# Altium PCB Power_Supply.PcbDoc (part 2 of 2)
Units mm, origin at the board's own origin, x right, y up, seen from the top; angles counter-clockwise.
Board outline 100.2 x 49.53 mm, 2 copper layers (Top Layer, Bottom Layer); 41 components, 25 nets, 105 pads, 0 vias.
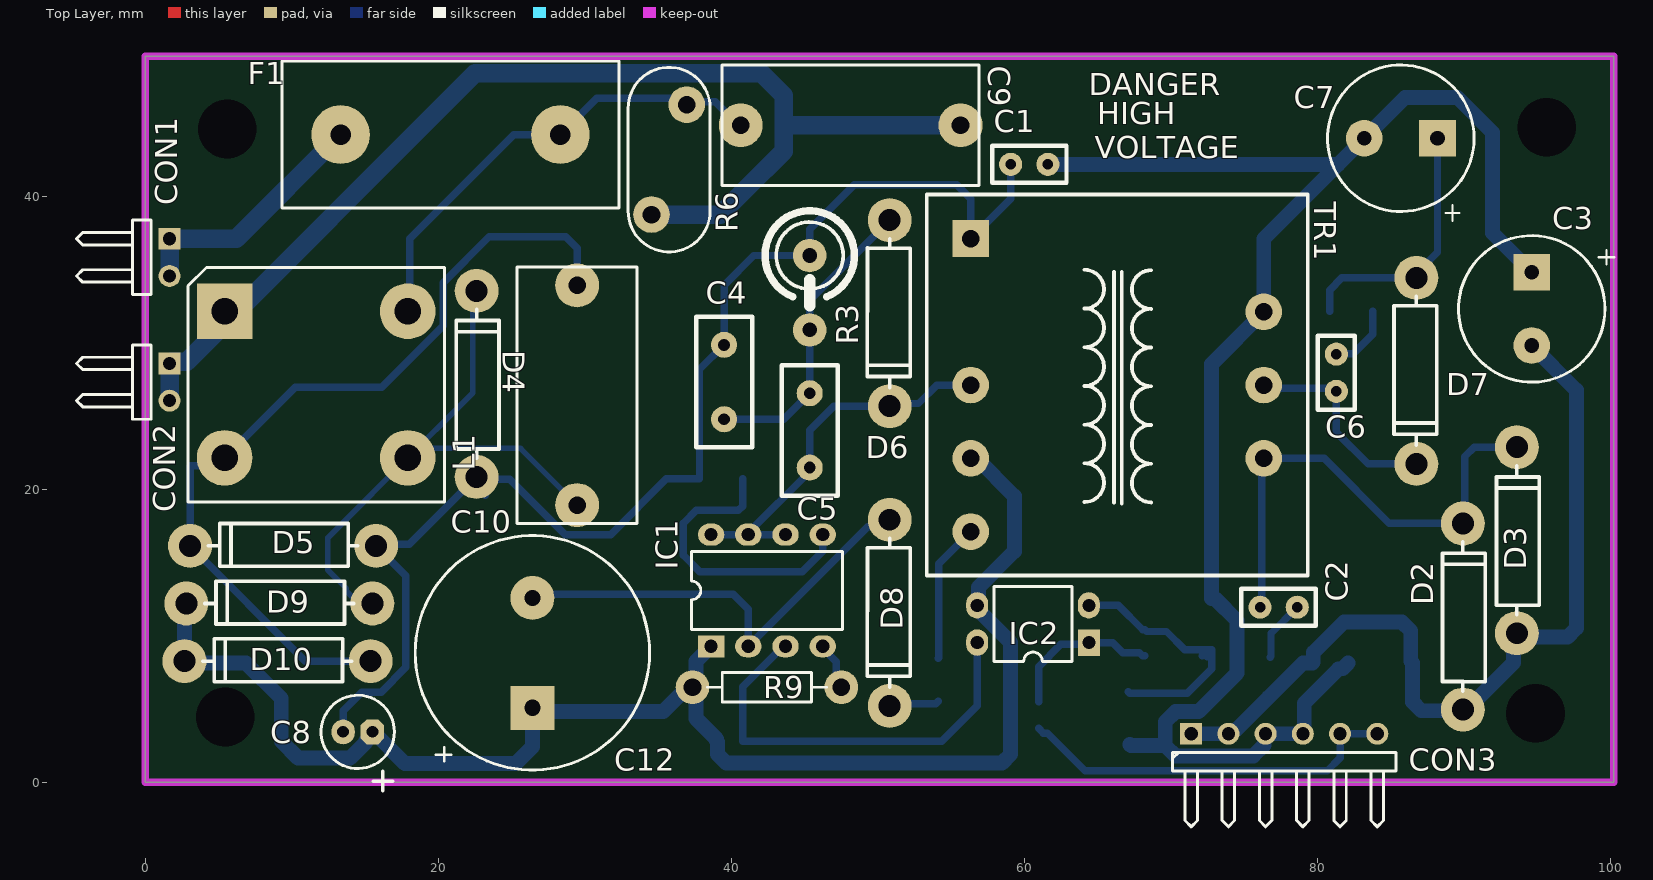
[diagram p0: Top Layer view]

## Part data (continued)
R3: library part "RES 100K 1W", "RES SMD 100K OHM 5% 1W 2512", Case Code (Metric)=6432, Case Code (Imperial)=2512, Manufacturer=Panasonic, Max Operating Temperature=155°C, Max Power Dissipation=1W, Min Operating Temperature=-55°C, Package Quantity=1, Resistance=100kR, Supplier Part Number 1=ERJ-1TYJ104U, Temperature Coefficient=200ppm/°C, Tolerance=5%, Voltage Rating=200V, Voltage Rating (DC)=250V, Case/Package=2512, Category="Chip SMD Resistors", Component=3, ComponentLink1Description=https://datasheet.ciiva.com/34303/2010000-34303803.pdf?src-supplier=Jameco, ComponentLink1URL=https://datasheet.ciiva.com/34303/2010000-34303803.pdf?src-supplier=Jameco, ComponentLink2Description=https://datasheet.ciiva.com/43469/1678796-43469942.pdf?src-supplier=Farnell, ComponentLink2URL=https://datasheet.ciiva.com/43469/1678796-43469942.pdf?src-supplier=Farnell, ComponentLink3Description=https://datasheet.ciiva.com/7830/1678796-7830968.pdf?src-supplier=Element14, ComponentLink3URL=https://datasheet.ciiva.com/7830/1678796-7830968.pdf?src-supplier=Element14, ComponentLink4Description=https://datasheet.ciiva.com/46380/1678796-46380426.pdf?src-supplier=Element14, ComponentLink4URL=https://datasheet.ciiva.com/46380/1678796-46380426.pdf?src-supplier=Element14, ComponentLink5Description=https://datasheet.ciiva.com/30120/4aoa0000ce1-30120107.pdf?src-supplier=Onlinecomponents.com, ComponentLink5URL=https://datasheet.ciiva.com/30120/4aoa0000ce1-30120107.pdf?src-supplier=Onlinecomponents.com, ComponentLink6Description=https://datasheet.ciiva.com/17208/aoa0000ce1-17208142.pdf?src-supplier=Avnet+Europe, ComponentLink6URL=https://datasheet.ciiva.com/17208/aoa0000ce1-17208142.pdf?src-supplier=Avnet+Europe, Composition="Thick Film", Contact Plating=Tin, Depth=3.2mm, Height=0.028inch, Lead Free="Lead Free", Length=6.4mm, Manufacturer Part Number="RES 100K 1W", Military Standard=Not, Mount="Surface Mount", Number of Terminations=2, Packaging="Tape and Reel", Power Rating=1W, Pricing 1="4000=0,05832, 8000=0,05681, 16000=0,05530, 24000=0,05378, 32000=0,05227 (USD)", Radiation Hardening=No, REACH SVHC="No SVHC", RoHS=Yes, Stock 1=8000, Supplier 1=Avnet, Width=0.126inch
R6: library part "VAR 320VAC/420VDC", "VARISTOR 2.5KA DISC 12MM", Capacitance=170pF, Clamping Current=25A, Clamping Voltage=840V, Manufacturer="TDK EPCOS", Max Operating Temperature=85°C, Max Surge Current=2.5kA, Max Voltage Rating (AC)=320V, Max Voltage Rating (DC)=420V, Min Operating Temperature=-40°C, Package Quantity=500, Supplier Part Number 1=871-B72210S321K101, Tolerance=10%, Varistor Voltage=510V, Category=Varistors, Component=4, ComponentLink1Description=https://datasheet.ciiva.com/11834/0900766b80188ddb-11834248.pdf?src-supplier=RSComponents, ComponentLink1URL=https://datasheet.ciiva.com/11834/0900766b80188ddb-11834248.pdf?src-supplier=RSComponents, ComponentLink2Description=https://datasheet.ciiva.com/20170/537488-da-en-01-20170157.pdf?src-supplier=Rapid+Electronics, ComponentLink2URL=https://datasheet.ciiva.com/20170/537488-da-en-01-20170157.pdf?src-supplier=Rapid+Electronics, ComponentLink3Description=https://datasheet.ciiva.com/26334/537488-da-01-en-scheibenvaristor-s10k320-26334969.pdf?src-supplier=Conrad, ComponentLink3URL=https://datasheet.ciiva.com/26334/537488-da-01-en-scheibenvaristor-s10k320-26334969.pdf?src-supplier=Conrad, ComponentLink4Description=https://datasheet.ciiva.com/1277/49936-1277937.pdf?src-supplier=Element14, ComponentLink4URL=https://datasheet.ciiva.com/1277/49936-1277937.pdf?src-supplier=Element14, ComponentLink5Description=https://datasheet.ciiva.com/15155/getdatasheetpartid-135776-15155558.pdf?src-supplier=Verical, ComponentLink5URL=https://datasheet.ciiva.com/15155/getdatasheetpartid-135776-15155558.pdf?src-supplier=Verical, Contact Plating=Tin, Current Rating=25A, Depth=5.4mm, Diameter=10mm, Energy=50J, Lead Length=30mm, Lead Pitch=7.5mm, Lead/Base Style=Radial, Manufacturer Part Number="VAR 320VAC/420VDC", Mount="Radial,Through Hole", Packaging=Bulk, Pricing 1="1=0,55000, 10=0,35700, 100=0,19900, 1000=0,14900, 2500=0,12800, 10000=0,12000 (USD)", REACH SVHC="No SVHC", RoHS=Yes, Stock 1=3061, Supplier 1=Mouser, Termination=Radial, Thickness=5.4mm, Voltage Rating (AC)=320V, Voltage Rating (DC)=420V, Voltage Tolerance=10%
R7: library part "RES 680R 1/8W", "Resistor;  Thick Film;  680 Ohms;  0.125 W;  5%;  SMT;  0805;  TCR 73 ppm/DegC;  Tape and Reel", Case Code (Metric)=2012, Case Code (Imperial)=0805, Manufacturer="Vishay Dale", Max Operating Temperature=155°C, Max Power Dissipation=125mW, Min Operating Temperature=-55°C, Package Quantity=1, Supplier Part Number 1=71-CRCW0805J-680-E3, Temperature Coefficient=200ppm/°C, Tolerance=5%, Voltage Rating=150V, Case/Package=0805, Category="Chip SMD Resistors", Component=5, ComponentLink1Description=https://datasheet.ciiva.com/17159/dcrcwe3-17159253.pdf?src-supplier=Avnet+Europe, ComponentLink1URL=https://datasheet.ciiva.com/17159/dcrcwe3-17159253.pdf?src-supplier=Avnet+Europe, ComponentLink2Description=https://datasheet.ciiva.com/2464/dcrcwe3-2464294.pdf?src-supplier=Digi-Key, ComponentLink2URL=https://datasheet.ciiva.com/2464/dcrcwe3-2464294.pdf?src-supplier=Digi-Key, ComponentLink3Description=https://datasheet.ciiva.com/2464/dcrcwe3-2464295.pdf?src-supplier=Digi-Key, ComponentLink3URL=https://datasheet.ciiva.com/2464/dcrcwe3-2464295.pdf?src-supplier=Digi-Key, ComponentLink4Description=https://datasheet.ciiva.com/2464/dcrcwe3-2464296.pdf?src-supplier=Digi-Key, ComponentLink4URL=https://datasheet.ciiva.com/2464/dcrcwe3-2464296.pdf?src-supplier=Digi-Key, ComponentLink5Description=https://datasheet.ciiva.com/8923/dcrcwe3-8923242.pdf?src-supplier=Avnet, ComponentLink5URL=https://datasheet.ciiva.com/8923/dcrcwe3-8923242.pdf?src-supplier=Avnet, ComponentLink6Description=https://datasheet.ciiva.com/8923/dcrcwe3-8923245.pdf?src-supplier=Avnet, ComponentLink6URL=https://datasheet.ciiva.com/8923/dcrcwe3-8923245.pdf?src-supplier=Avnet, ComponentLink7Description=https://datasheet.ciiva.com/16781/70201119-16781375.pdf?src-supplier=Allied+Electronics, ComponentLink7URL=https://datasheet.ciiva.com/16781/70201119-16781375.pdf?src-supplier=Allied+Electronics, Composition="Thick Film", Contact Plating=Tin, Depth=1.25mm, Features="Automotive AEC-Q200", Height=0.45mm, Lead Free="Lead Free", Length=2mm, Manufacturer Part Number="RES 680R 1/8W", Military Standard=Not, Number of Pins=2, Number of Terminations=2, Packaging="Tape and Reel", Power Rating=125mW, Pricing 1="1=0,10000, 10=0,03900, 100=0,01500, 1000=0,00600, 5000=0,00400, 10000=0,00400 (USD)", Radiation Hardening=No, REACH SVHC=Unknown, Resistance=680R, RoHS=Yes, Stock 1=12983, Supplier 1=Mouser, Termination=SMD/SMT, Voltage Rating (DC)=150V, Weight=0.000194oz, Width=1.25mm
R8: library part "RES 1K 1/8W", "RESISTOR, 0805 1K 1%, FULL REEL; Product Range:YAGEO - RC Series; Resistance:1kohm; Power Rating:125mW; Resistance Tolerance:± 1%; Resistor Case Style:0805 [2012 Metric]; Resistor Element Material:Thick Film; Temperature Coefficient:± 250ppm/°C; Voltage R", Case Code (Metric)=2012, Case Code (Imperial)=0805, Manufacturer=Yageo, Max Operating Temperature=155°C, Max Power Dissipation=125mW, Min Operating Temperature=-55°C, Package Quantity=1, Resistance=1kR, Supplier Part Number 1=603-RC0805FR-071KL, Temperature Coefficient=100ppm/°C, Tolerance=1%, Voltage Rating=150V, Case/Package=0805, Category="Chip SMD Resistors", Component=6, ComponentLink1Description=https://datasheet.ciiva.com/2456/pyu-r-int-thick-7-2456976.pdf?src-supplier=Digi-Key, ComponentLink1URL=https://datasheet.ciiva.com/2456/pyu-r-int-thick-7-2456976.pdf?src-supplier=Digi-Key, ComponentLink2Description=https://datasheet.ciiva.com/2456/pyu-r-int-thick-7-2456977.pdf?src-supplier=Digi-Key, ComponentLink2URL=https://datasheet.ciiva.com/2456/pyu-r-int-thick-7-2456977.pdf?src-supplier=Digi-Key, ComponentLink3Description=https://datasheet.ciiva.com/7941/1686128-7941719.pdf?src-supplier=Element14, ComponentLink3URL=https://datasheet.ciiva.com/7941/1686128-7941719.pdf?src-supplier=Element14, ComponentLink4Description=https://datasheet.ciiva.com/16850/rc0805-16850409.pdf?src-supplier=Future+Electronics, ComponentLink4URL=https://datasheet.ciiva.com/16850/rc0805-16850409.pdf?src-supplier=Future+Electronics, ComponentLink5Description=https://datasheet.ciiva.com/46385/444164-46385020.pdf?src-supplier=Element14, ComponentLink5URL=https://datasheet.ciiva.com/46385/444164-46385020.pdf?src-supplier=Element14, ComponentLink6Description=https://datasheet.ciiva.com/2456/pyu-r-int-thick-7-2456975.pdf?src-supplier=Digi-Key, ComponentLink6URL=https://datasheet.ciiva.com/2456/pyu-r-int-thick-7-2456975.pdf?src-supplier=Digi-Key, Composition="Thick Film", Depth=1.25mm, Features="Moisture Resistant", Height=0.024inch, Lead Free="Lead Free", Length=0.079inch, Manufacturer Part Number="RES 1K 1/8W", Military Standard=Not, Number of Pins=2, Number of Terminations=2, Packaging="Tape and Reel", Power Rating=125mW, Pricing 1="1=0,13000, 10=0,03100, 100=0,01100, 1000=0,00800, 5000=0,00500, 10000=0,00500 (USD)", REACH SVHC=Unknown, RoHS=Yes, Stock 1=1023389, Supplier 1=Mouser, Termination=SMD/SMT, Voltage Rating (DC)=150V, Width=0.049inch
R9: library part "RES  6.8K 1/4W", "RES 6.8K OHM 1/4W 5% CF MINI", Case/Package=Axial, Manufacturer="Stackpole Electronics", Max Operating Temperature=155°C, Max Power Dissipation=250mW, Min Operating Temperature=-55°C, Package Quantity=1, Resistance=6.8kR, Supplier Part Number 1=S6.8KQCT-ND, Temperature Coefficient=-400ppm/°C, Tolerance=5%, Category="Through-Hole Resistors", Component=7, ComponentLink1Description=https://www.seielect.com/Catalog/SEI-CF_CFM.pdf?src-supplier=Digi-Key, ComponentLink1URL=https://www.seielect.com/Catalog/SEI-CF_CFM.pdf?src-supplier=Digi-Key, ComponentLink2Description=https://www.seielect.com/catalog/SEI-CF_CFM.pdf?src-supplier=Avnet, ComponentLink2URL=https://www.seielect.com/catalog/SEI-CF_CFM.pdf?src-supplier=Avnet, Composition="Carbon Film", Contact Plating=Tin,Matte, Diameter=1.7mm, Features="Flame Retardant Coating", Lead Free="Lead Free", Length=0.13inch, Manufacturer Part Number="RES  6.8K 1/4W", Mount="Through Hole,Axial", Number of Terminations=2, Packaging="Tape and Reel", Pricing 1="1=0,10000, 10=0,04100, 25=0,03000, 50=0,02280, 100=0,01690, 250=0,01288, 500=0,01030, 1000=0,00758 (USD)", Radiation Hardening=No, RoHS=Yes, Stock 1=1056, Supplier 1=Digi-Key
TR1: library part ETO, "Trafo", Manufacturer=Waldmann, Operating Supply Voltage=230V, Supplier Part Number 1=25R4600, Category="Soldering Supplies and Tools", Component=1, ComponentLink1Description=https://datasheet.ciiva.com/1744/415710-1744293.pdf?src-supplier=Newark, ComponentLink1URL=https://datasheet.ciiva.com/1744/415710-1744293.pdf?src-supplier=Newark, ComponentLink2Description=https://datasheet.ciiva.com/1533/415710-1533816.pdf?src-supplier=Element14, ComponentLink2URL=https://datasheet.ciiva.com/1533/415710-1533816.pdf?src-supplier=Element14, Lead Free="Lead Free", Length=800um, Manufacturer Part Number=ETO, Number of Contacts=0, Number of Elements=0, Number of Positions=0, Number of Rows=0, Number of Unidirectional Channels=0, RoHS=Yes, Supplier 1=Newark, Thickness=1.12mm

## Free pads (board coordinates)
  round 1.524 hole 4: 1(5.461,4.445) 2(5.588,44.577) 3(95.631,44.704) 4(94.869,4.699)

## Nets (pads, with @x,y where several pads share a name; then routed paths per layer and width w, separated by ;. In a path a pad name is that pad's centre, name@x,y a point inside that pad or via, vN(x,y) a via of type N, cw(c..) or ccw(c..) an arc to the next point about the centre after c; other vN are vias at no path point)
+6V: CON3.5 CON3.6 R7.1 | length 26.4
  Bottom Layer w0.254: 64.083,0.699 64.147,0.762
  Bottom Layer w0.508: R7.1 61.281,3.351 61.558,3.351 64.147,0.762 80.645,0.762 81.534,1.651 CON3.5 CON3.6
+24V: C3.2 CON3.1 CON3.2 D1.1 D2.1 D3.1 R1.1 | length 59.3
  Bottom Layer w1.016: CON3.1 74.045,3.302 74.287,3.544 74.41,3.544 76.634,5.768 76.641,5.768 79.015,8.142 79.665,8.142 79.707,8.184 R1.1 79.707,8.834 81.795,10.922 85.765,10.922 86.36,10.327 86.36,8.255 D1.1 86.487,5.467 87.082,4.872 89.743,4.872 89.789,4.826 90.043,4.826 93.366,8.149 93.366,9.927 D3.1 93.853,9.906 97.068,9.906 97.663,10.501 97.663,26.75 C3.2
GND: C1.1 C3.1 C7.2 CON3.3 CON3.4 D1.2 D11.2 D12.2 TR1.9 | length 110.1
  Bottom Layer w1.016: C1.1 81.407,42.164 ; D11.2 67.26,2.491 69.607,2.491 ; D12.2 72.771,28.542 TR1.9 76.327,37.084 81.407,42.164 ; D12.2@72.997,12.534 74.509,11.022 74.509,7.453 71.87,4.814 70.308,4.814 69.607,4.113 69.607,2.491 ; D1.2 81.695,7.736 81.437,7.736 79.087,5.386 79.087,3.395 CON3.4 CON3.3 76.361,3.209 76.361,2.535 75.617,1.79 70.308,1.79 69.607,2.491 ; C3.1 91.948,37.465 91.948,44.323 89.535,46.736 85.979,46.736 C7.2 81.407,42.164
GND_M: C8.1 C11.2 C12.1 D9.2 D10.2 IC1.1 IC2.3 R9.2 TR1.4 | length 101
  Bottom Layer w1.016: D9.2@2.667,12.319 D10.2 2.801,8.121 6.865,8.121 9.271,5.715 9.271,2.794 10.414,1.651 13.975,1.651 15.056,2.732 C8.1@15.056,2.839 ; C8.1 15.546,3.429 17.705,1.27 25.273,1.27 26.416,2.413 C12.1 26.663,4.826 35.346,4.826 36.997,6.477 R9.2 ; IC1.1 38.458,9.271 38.216,9.029 38.216,8.879 37.584,8.247 37.584,6.723 R9.2 ; TR1.4 56.729,22.098 59.309,19.518 59.309,15.748 56.862,13.301 56.862,12.158 IC2.3 56.769,11.813 59.055,9.527 59.055,1.902 58.46,1.307 39.64,1.307 39.045,1.902 39.045,2.727 C11.2 38.978,2.944 37.584,4.338 37.584,6.231 R9.2
LINE: C9.1 F1.1 L1.4 R6.1 | length 32.5
  Bottom Layer w0.508: L1.4 18.034,32.258 18.034,37.084 25.146,44.196 F1.1 30.801,46.676 36.887,46.676 37.135,46.428 38.899,46.428 40.496,44.831 C9.1@40.767,44.831
NetC1_2: C1.2 C4.1 C8.2 D4.1 D5.1 R2.1 R3.1 TR1.1 | length 88
  Bottom Layer w0.508: C8.2 13.494,4.858 14.777,6.141 16.092,6.141 17.78,7.828 17.78,14.097 D5.1 15.851,16.232 18.01,16.232 D4.1 22.769,20.665 24.868,20.665 28.642,16.891 31.75,16.891 35.56,20.701 R2.1 37.817,28.165 C4.1 39.497,33.909 41.529,35.941 R3.1 ; D4.1@22.733,20.066 D4.1@23.21,19.589 ; R3.1@45.339,35.814 45.339,37.719 48.387,40.767 55.372,40.767 56.327,39.812 TR1.1 59.055,39.826 C1.2
NetC2_1: C2.1 R1.2 | length 4.2
  Bottom Layer w0.508: R1.2 76.821,8.573 76.821,10.146 C2.1
NetC2_2: C2.2 D2.2 D3.2 TR1.7 | length 34.1
  Bottom Layer w0.508: C2.2 76.2,12.065 76.2,21.971 TR1.7 80.45,22.098 84.895,17.653 D2.2 90.043,17.78 90.043,22.225 90.678,22.86 D3.2
NetC4_2: C4.2 C5.1 D6.1 R3.2 | length 20.7
  Bottom Layer w0.508: C4.2 43.561,24.765 C5.1 R3.2 45.339,32.893 D6.1
NetC5_2: C5.2 D6.2 IC1.6 IC1.7 IC1.8 TR1.3 | length 26.2
  Bottom Layer w0.508: IC1.8 IC1.7 ; IC1.6 IC1.7 ; TR1.3 54.022,27.098 52.764,25.84 50.986,25.84 D6.2 46.99,25.654 45.339,24.003 C5.2 45.339,21.197 41.148,17.006 IC1.7
NetC6_1: C6.1 R4.2 | length 4.6
  Bottom Layer w0.508: C6.1 81.296,29.226 82.439,29.226 83.771,30.558 R4.2
NetC6_2: C6.2 D7.2 TR1.8 | length 14.3
  Bottom Layer w0.508: TR1.8 76.551,26.874 81.076,26.874 C6.2 81.28,23.876 83.439,21.717 D7.2
NetC7_1: C7.1 D7.1 R4.1 | length 17.8
  Bottom Layer w0.508: R4.1 80.821,33.577 81.661,34.417 D7.1 86.741,34.728 88.185,36.172 C7.1
NetC10_1: C10.1 D4.2 D9.1 L1.3 | length 39.7
  Bottom Layer w0.381: D9.1@15.367,12.319 14.993,12.693 14.051,12.693 13.716,13.028 13.716,13.208 12.446,14.478 12.446,16.67 L1.3@18.548,22.772 ; D4.2 22.347,33.269 22.347,26.571 21.014,25.238 L1.3@18.548,22.772 ; C10.1 25.6,22.772 L1.3@18.548,22.772
NetC10_2: C10.2 D5.2 D10.1 L1.2 | length 58.5
  Bottom Layer w0.508: D10.1 10.922,8.255 D5.2 3.048,21.59 4.866,21.59 L1.2 10.223,26.947 16.129,26.947 20.315,31.134 20.315,34.077 23.449,37.211 28.702,37.211 29.464,36.449 C10.2
NetC11_1: C11.1 IC1.3 IC2.4 | length 29.1
  Bottom Layer w0.508: IC1.3 43.538,9.271 40.778,6.511 C11.1 54.356,2.794 56.769,5.207 IC2.4
NetC12_2: C12.2 D8.1 IC1.2 | length 31
  Bottom Layer w0.508: C12.2 26.67,12.827 40.132,12.827 41.148,11.811 IC1.2 49.307,17.43 50.323,17.43 D8.1
NetCON1_1: CON1.1 CON1.2 F1.2 | length 17.2
  Bottom Layer w1.27: CON1.2 CON1.1 6.209,37.084 F1.2
NetD8_2: D8.2 R5.2 | length 3.4
  Bottom Layer w0.508: D8.2 50.952,5.359 53.95,5.359 R5.2
NetD11_1: D11.1 D12.1 IC2.2 R8.2 | length 18.4
  Bottom Layer w0.508: IC2.2 66.398,12.065 68.049,10.414 R8.2 68.332,10.281 69.686,10.281 70.922,9.045 D12.1@72.404,9.045 ; D11.1@67.075,6.176 D11.1 71.092,6.068 72.771,7.747 D12.1 D12.1@72.404,9.045 ; D12.1@72.125,8.614 72.412,8.901 D12.1@72.412,8.991 ; D12.1@72.479,8.548 D12.1@72.412,8.991 ; D12.1@72.404,9.045 D12.1@72.412,8.991
NetR2_2: IC1.5 R2.2 | length 20.3
  Bottom Layer w0.508: R2.2 40.767,18.84 40.469,18.542 37.592,18.542 36.723,17.673 36.723,15.474 37.846,14.351 44.831,14.351 46.228,15.748 IC1.5
NetR5_1: R5.1 TR1.5 | length 9.6
  Bottom Layer w0.508: R5.1 54.139,8.497 54.139,14.91 TR1.5
NetR7_2: IC2.1 R7.2 R8.1 | length 10.7
  Bottom Layer w0.508: R7.2 60.96,7.874 62.484,9.398 64.262,9.398 IC2.1 66.011,9.525 66.712,8.824 67.839,8.824 68.049,8.614 R8.1
NetR9_1: IC1.4 R9.1 | length 3.3
  Bottom Layer w0.508: IC1.4 46.228,9.153 47.155,8.225 47.155,6.82 R9.1
NEUTRAL: C9.2 CON2.1 CON2.2 L1.1 R6.2 | length 81.9
  Bottom Layer w0.508: 40.997,40.489 41.251,40.489 42.418,41.656
  Bottom Layer w1.27: CON2.2 CON2.1 1.766,28.69 2.815,28.69 22.499,48.374 42.05,48.374 43.561,46.863 43.561,44.831 ; R6.2 39.243,38.735 40.997,40.489 43.561,43.053 43.561,44.831 ; C9.2 43.561,44.831

## Keep-outs
Keep-Out Layer:
  lines w0.254: -0.127,0 ccw(c0,0) 0,-0.127 ; -0.127,0 ccw(c0,0) 0,-0.127 ; -0.127,0 -0.127,49.53 ; -0.127,49.53 cw(c0,49.53) 0,49.657 ; -0.127,49.53 cw(c0,49.53) 0,49.657 ; 0,-0.127 100.203,-0.127 ; 0,49.657 100.203,49.657 ; 100.203,-0.127 ccw(c100.203,0) 100.33,0 ; 100.203,-0.127 ccw(c100.203,0) 100.33,0 ; 100.203,49.657 cw(c100.203,49.53) 100.33,49.53 ; 100.203,49.657 cw(c100.203,49.53) 100.33,49.53 ; 100.33,0 100.33,49.53 ; 0.127,0.127 0.127,49.403 100.076,49.403 100.076,0.127 0.127,0.127

## Silkscreen, mask and mechanical layers (free items; w line width, h text height)
Top Overlay:
  text "DANGER" at 64.389,46.863 h1.52
  text "HIGH" at 64.97,44.904 h1.52
  text "VOLTAGE" at 64.789,42.564 h1.52
Mechanical 1:
  lines w0.254: 0,0.127 0,49.53 100.203,49.53 100.203,0.127 0,0.127